# Altium PCB Parking_Guidance.PcbDoc
Units mm, origin at the board's own origin, x right, y up, seen from the top; angles counter-clockwise.
Board outline 152.4 x 101.6 mm, 2 copper layers (Top Layer, Bottom Layer); 101 components, 66 nets, 301 pads, 0 vias.
Unrouted connection lines stored in the file: 215.
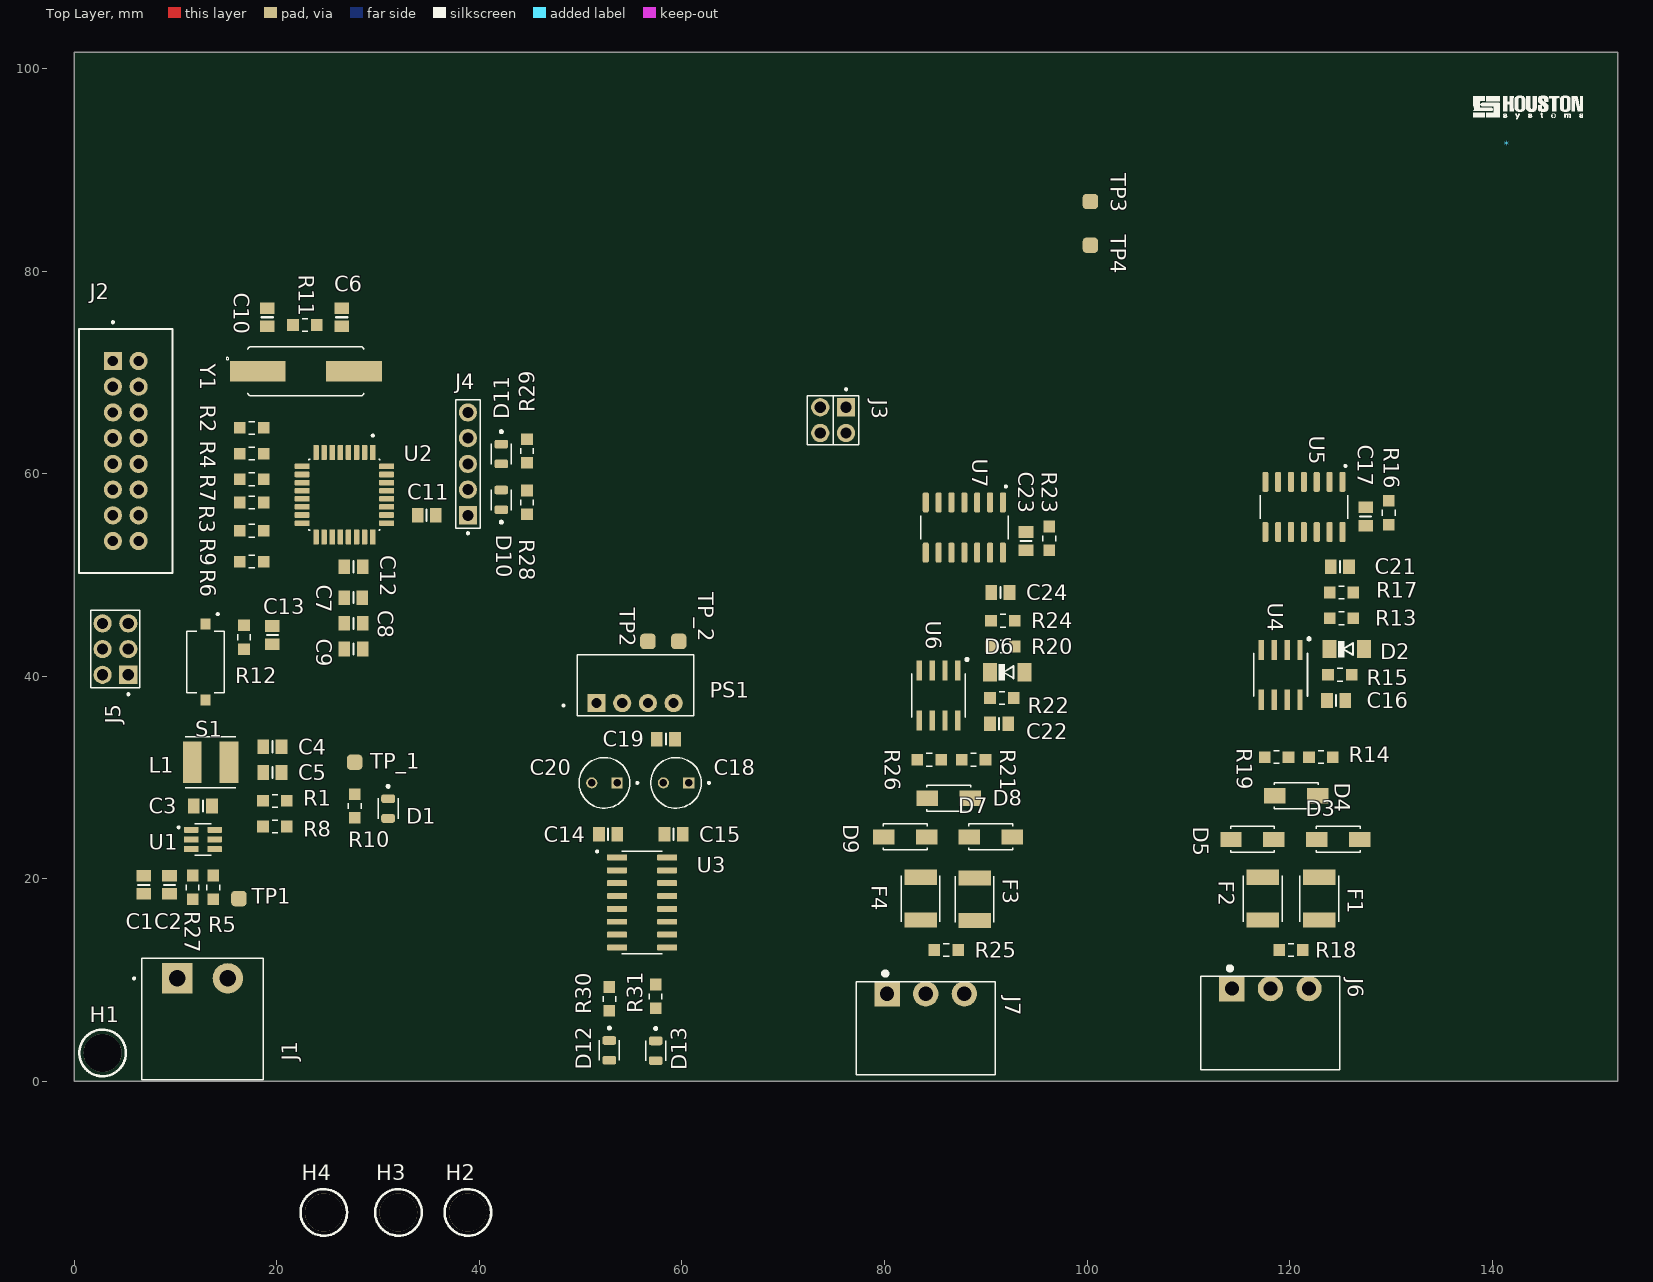
[diagram p0: Top Layer view]
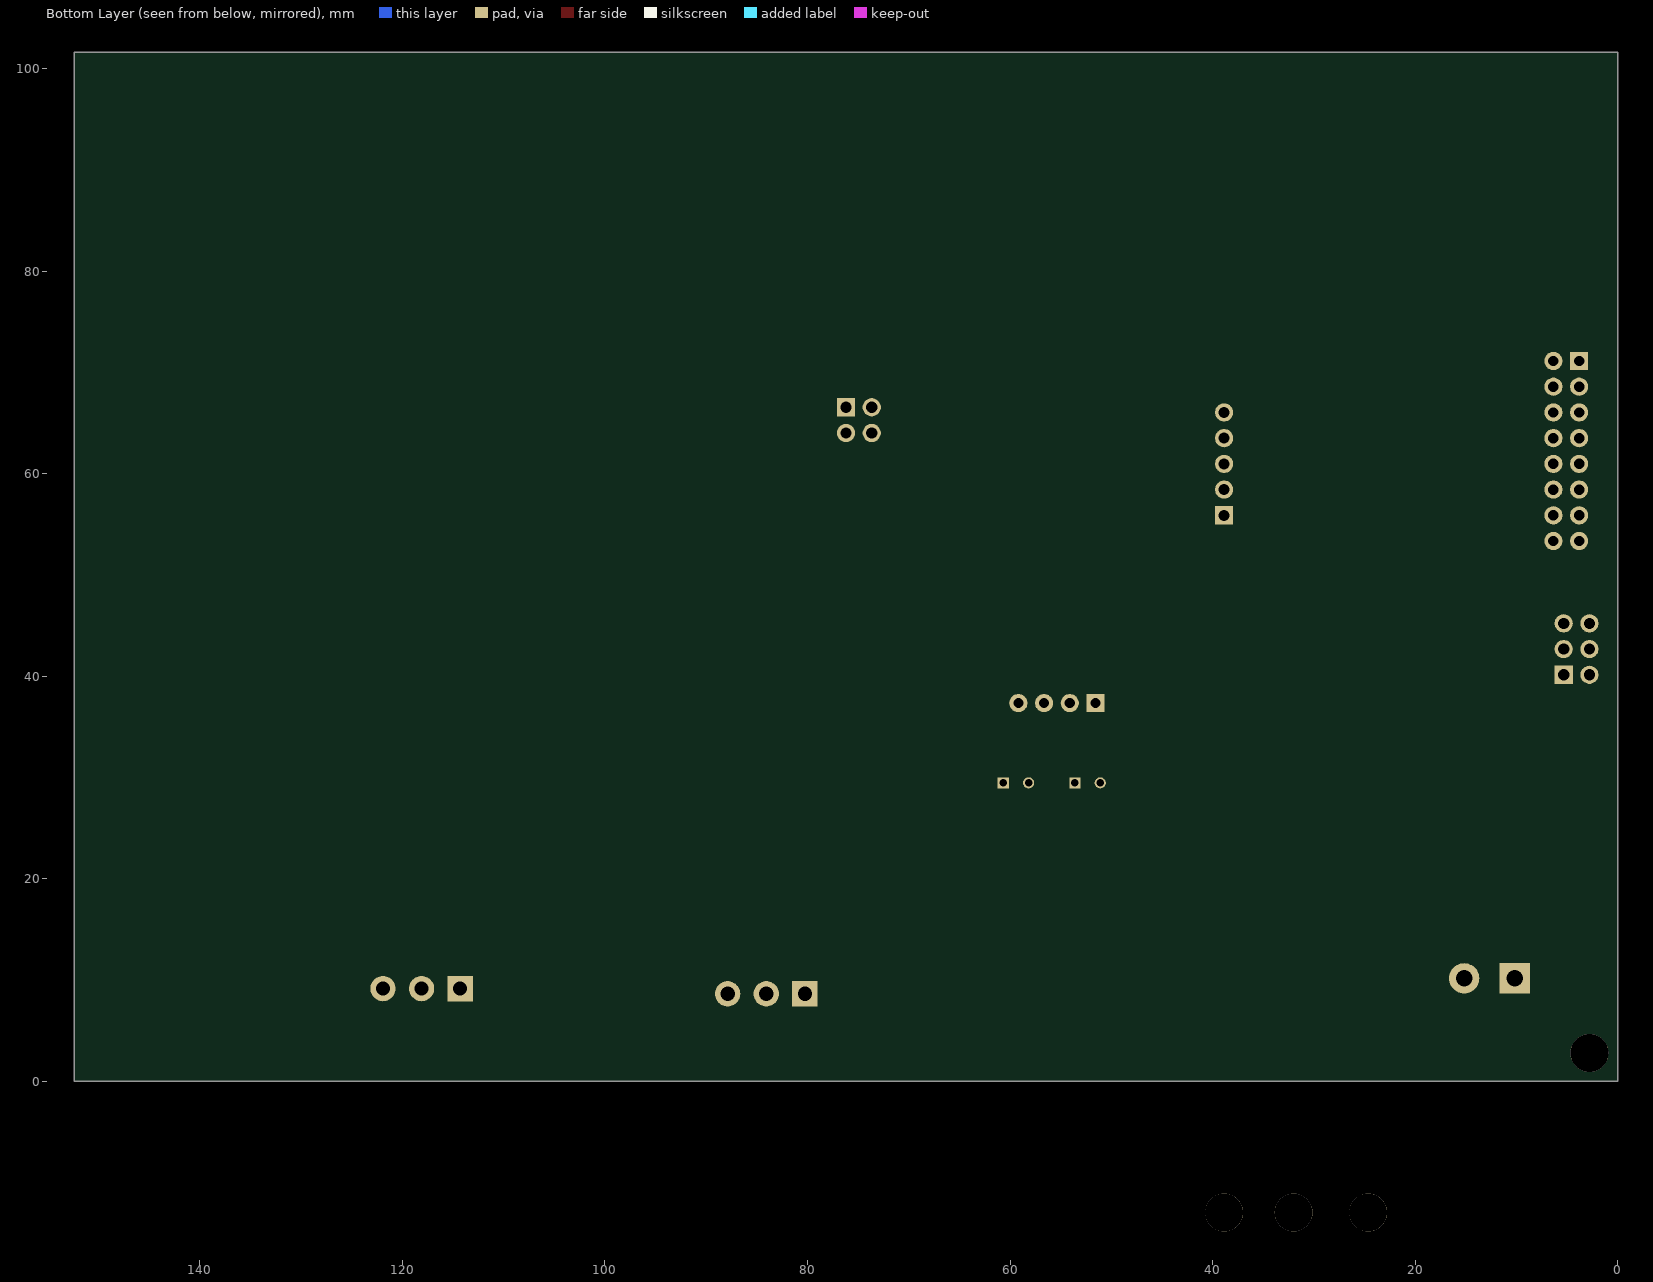
[diagram p1: Bottom Layer view, seen from below]

## Layer stack, top to bottom
Top Solder: solder mask 0.0102, Solder Resist, Dk 3.5
Top Layer: signal copper 0.0356
Dielectric 1: dielectric 0.32, FR-4, Dk 4.8
Bottom Layer: signal copper 0.0356
Bottom Solder: solder mask 0.0102, Solder Resist, Dk 3.5

## Board outline
0,0 152.4,0 152.4,101.6 0,101.6

## Design rules (kind name [scope] priority, off if disabled: settings)
Clearance [All] p1: gap=0.25 ignorepadtopadclearanceinfootprint=FALSE
PolygonConnect [All] p1: connectstyle=Relief reliefconductorwidth=0.254 reliefentries=4 polygonreliefangle="90 Angle" airgapwidth=0.254
RoutingVias [All] p1: holewidth=0.711 width=1.27 viastyle="Through Hole" minholewidth=0.711 minwidth=1.27 maxholewidth=0.711 maxwidth=1.27
SolderMaskExpansion [All] p1: expansion=0.102 istentingtop=FALSE
SupplyNets "Schematic Supply Nets_4" [InNet('GND')] p1: voltage=0.000
SupplyNets "Schematic Supply Nets_3" [InNet('+5')] p2: voltage=0.000
SupplyNets "Schematic Supply Nets_2" [InNet('+24')] p3: voltage=0.000
SupplyNets "Schematic Supply Nets_1" [InNet('EARTH')] p4: voltage=0.000
SupplyNets "Schematic Supply Nets" [InNet('VCC')] p5: voltage=0.000
Width [All] p1: maxlimit=0.254 minlimit=0.254 preferedwidth=0.254
30 further rules are at their usual default settings.

## Classes and differential pairs
component class PGS_4: * C14 C15 C16 C17 C18 C19 C20 C21 C22 C23 C24 D2 D3 D4 D5 D6 D7 D8 D9 D12 D13 F1 F2 F3 F4 H1 H2 H3 H4 J6 J7 PS1 R13 R14 R15 R16 R17 R18 R19 R20 R21 R22 R23 R24 R25 R26 R30 R31 U3 U4 U5 U6 U7
component class PGS_3: C1 C2 C3 C4 C5 C6 C7 C8 C9 C10 C11 C12 C13 D1 D10 D11 J1 J2 J3 J4 J5 L1 R1 R2 R3 R4 R5 R6 R7 R8 R9 R10 R11 R12 R27 R28 R29 S1 TP1 TP2 TP3 TP4 TP_1 TP_2 U1 U2 Y1

## Components (designator, comment, footprint, x,y, rotation, side; value= is the part's Value field where it differs from the comment)
* "HOUSTON_LOGO" HOUSTON_LOGO 141.478,92.456 r0 top
C1 "CAP 10uF 50V 0805" "CAP CER 0.1uF/50V 5%" 6.858,19.399 r90 top
C2 "CAP 0.1uF 50V 0805" "CAP CER 0.1uF/50V 5%" 9.398,19.399 r90 top
C3 "CAP 0.1uF 50V 0805" "CAP CER 0.1uF/50V 5%" 12.7,27.178 r180 top
C4 "CAP 22uF 50V 0805" "CAP CER 0.1uF/50V 5%" 19.558,33.02 r180 top
C5 "CAP 22uF 50V 0805" "CAP CER 0.1uF/50V 5%" 19.558,30.48 r180 top
C6 "CAP 22pF 50V 0805" "CAP CER 0.1uF/50V 5%" 26.416,75.438 r270 top
C7 "CAP 0.1uF 50V 0805" "CAP CER 0.1uF/50V 5%" 27.548,47.752 r180 top
C8 "CAP 0.1uF 50V 0805" "CAP CER 0.1uF/50V 5%" 27.57,45.212 r180 top
C9 "CAP 0.1uF 50V 0805" "CAP CER 0.1uF/50V 5%" 27.57,42.672 r180 top
C10 "CAP 22pF 50V 0805" "CAP CER 0.1uF/50V 5%" 19.05,75.438 r270 top
C11 "CAP 0.1uF 50V 0805" "CAP CER 0.1uF/50V 5%" 34.798,55.88 r0 top
C12 "CAP 0.1uF 50V 0805" "CAP CER 0.1uF/50V 5%" 27.57,50.8 r180 top
C13 "CAP 0.1uF 50V 0805" "CAP CER 0.1uF/50V 5%" 19.558,44.058 r270 top
C14 "CAP 0.1uF 50V 0805" "CAP CER 0.1uF/50V 5%" 52.716,24.384 r0 top
C15 "CAP 0.1uF 50V 0805" "CAP CER 0.1uF/50V 5%" 59.182,24.384 r0 top
C16 "CAP 0.1uF 50V 0805" "CAP CER 0.1uF/50V 5%" 124.598,37.592 r180 top
C17 "CAP 0.1uF 50V 0805" "CAP CER 0.1uF/50V 5%" 127.508,55.764 r270 top
C18 "CAP ELE 10µF 25V TH" "CAP ELE 10µF 25V TH" 59.416,29.464 r180 top
C19 "CAP 0.1uF 50V 0805" "CAP CER 0.1uF/50V 5%" 58.42,33.782 r0 top
C20 "CAP ELE 10µF 25V TH" "CAP ELE 10µF 25V TH" 52.344,29.464 r180 top
C21 "CAP 0.1uF 50V 0805" "CAP CER 0.1uF/50V 5%" 124.968,50.8 r180 top
C22 "CAP 0.1uF 50V 0805" "CAP CER 0.1uF/50V 5%" 91.324,35.306 r180 top
C23 "CAP 0.1uF 50V 0805" "CAP CER 0.1uF/50V 5%" 93.98,53.34 r270 top
C24 "CAP 0.1uF 50V 0805" "CAP CER 0.1uF/50V 5%" 91.44,48.26 r180 top
D1 "LED-0805" LED-0805 30.988,26.924 r270 top
D2 "DIODE FDLL4148 SOD80C" "DIODE SOD80C" 125.652,42.672 r0 top
D3 "TVS Diode DO-214AC" "TVS Diode DO-214AC" 124.797,23.876 r0 top
D4 "TVS Diode DO-214AC" "TVS Diode DO-214AC" 120.65,28.194 r0 top
D5 "TVS Diode DO-214AC" "TVS Diode DO-214AC" 116.332,23.876 r0 top
D6 "DIODE FDLL4148 SOD80C" "DIODE SOD80C" 92.124,40.386 r0 top
D7 "TVS Diode DO-214AC" "TVS Diode DO-214AC" 90.507,24.13 r0 top
D8 "TVS Diode DO-214AC" "TVS Diode DO-214AC" 86.36,27.94 r0 top
D9 "TVS Diode DO-214AC" "TVS Diode DO-214AC" 82.042,24.13 r0 top
D10 "LED-0805" LED-0805 42.164,57.404 r90 top
D11 "LED-0805" LED-0805 42.164,61.935 r270 top
D12 "LED-0805" LED-0805 52.832,3.048 r270 top
D13 "LED-0805" LED-0805 57.404,3.007 r270 top
F1 "FUSE JK010 1812" "FUSE JK010 1812" 122.936,18.034 r270 top
F2 "FUSE JK010 1812" "FUSE JK010 1812" 117.348,18.034 r270 top
F3 "FUSE JK010 1812" "FUSE JK010 1812" 88.9,17.966 r270 top
F4 "FUSE JK010 1812" "FUSE JK010 1812" 83.566,18.034 r270 top
H1 "ScrewHole_3.75mmD" "ScrewHole_3.75mmD - duplicate" 2.794,2.794 r0 top
H2 "ScrewHole_3.75mmD" "ScrewHole_3.75mmD - duplicate" 38.862,-12.954 r0 top
H3 "ScrewHole_3.75mmD" "ScrewHole_3.75mmD - duplicate" 32.004,-12.954 r0 top
H4 "ScrewHole_3.75mmD" "ScrewHole_3.75mmD - duplicate" 24.638,-12.954 r0 top
J1 "2 Pin Terminal Block 5MM RA" "2 Pin Terminal Block 5MM RA" 10.16,10.16 r0 top
J2 "BOX HEADER MALE THT S/T 8X2 2.54mm" "BOX HEADER MALE 8X2 2.54mm" 3.81,71.12 r270 top
J3 "4 Pin 2X2Pos BergeStick 2.54MM" "4 Pin BergeStick 2.54MM" 74.93,65.278 r270 top
J4 "5 Pin BergeStick 2.54MM" "5 Pin BergeStick 2.54MM" 38.862,60.96 r90 top
J5 "6 Pin BergeStick 2.54MM" "6 Pin BergeStick 2.54MM - duplicate" 4.064,42.672 r180 top
J6 "3 Pin Terminal Block 3.81MM RA" "3 Pin Terminal Block 3.81MM RA" 118.11,9.144 r0 top
J7 "3 Pin Terminal Block 3.81MM RA" "3 Pin Terminal Block 3.81MM RA" 84.074,8.636 r0 top
L1 "INDUCTOR 12uH SDE0403A-120M" "INDUCTOR 12uH SDE0403A-120M" 13.462,31.496 r0 top
PS1 "RFM-0505S SIP4" RFM-0505S 55.412,39.088 r0 top
R1 "RES 75K 0.25W 5% 0805" "RES 0805 10K/0.25W 5%" 19.812,27.686 r0 top
R2 "RES 0E 0.25W 5% 0805" "RES 0805 10K/0.25W 5%" 17.526,64.516 r0 top
R3 "RES 0E 0.25W 5% 0805" "RES 0805 10K/0.25W 5%" 17.526,57.15 r180 top
R4 "RES 0E 0.25W 5% 0805" "RES 0805 10K/0.25W 5%" 17.526,61.976 r0 top
R5 "RES 10K 0.25W 5% 0805" "RES 0805 10K/0.25W 5%" 13.716,19.145 r90 top
R6 "RES 0E 0.25W 5% 0805" "RES 0805 10K/0.25W 5%" 17.526,51.308 r0 top
R7 "RES 0E 0.25W 5% 0805" "RES 0805 10K/0.25W 5%" 17.526,59.436 r0 top
R8 "RES 10K 0.25W 5% 0805" "RES 0805 10K/0.25W 5%" 19.812,25.146 r180 top
R9 "RES 0E 0.25W 5% 0805" "RES 0805 10K/0.25W 5%" 17.526,54.356 r0 top
R10 "RES 470E 0.25W 5% 0805" "RES 0805 10K/0.25W 5%" 27.686,27.178 r90 top
R11 "RES 1M 0.25W 5% 0805" "RES 0805 10K/0.25W 5%" 22.765,74.676 r0 top
R12 "RES 10K 0.25W 5% 0805" "RES 0805 10K/0.25W 5%" 16.764,43.847 r90 top
R13 "RES 56K 0.25W 5% 0805" "RES 0805 10K/0.25W 5%" 125.127,45.72 r0 top
R14 "RES 4.7K 0.25W 5% 0805" "RES 0805 10K/0.25W 5%" 123.095,32.004 r0 top
R15 "RES 10K 0.25W 5% 0805" "RES 0805 10K/0.25W 5%" 124.968,40.132 r0 top
R16 "RES 4.7K 0.25W 5% 0805" "RES 0805 10K/0.25W 5%" 129.794,56.134 r270 top
R17 "RES 0E 0.25W 5% 0805" "RES 0805 10K/0.25W 5%" 125.127,48.26 r0 top
R18 "RES 120E 0.25W 5% 0805" "RES 0805 10K/0.25W 5%" 120.142,12.954 r0 top
R19 "RES 4.7K 0.25W 5% 0805" "RES 0805 10K/0.25W 5%" 118.713,32.004 r0 top
R20 "RES 56K 0.25W 5% 0805" "RES 0805 10K/0.25W 5%" 91.694,42.926 r0 top
R21 "RES 4.7K 0.25W 5% 0805" "RES 0805 10K/0.25W 5%" 88.805,31.75 r0 top
R22 "RES 10K 0.25W 5% 0805" "RES 0805 10K/0.25W 5%" 91.599,37.846 r0 top
R23 "RES 4.7K 0.25W 5% 0805" "RES 0805 10K/0.25W 5%" 96.266,53.594 r270 top
R24 "RES 0E 0.25W 5% 0805" "RES 0805 10K/0.25W 5%" 91.694,45.466 r0 top
R25 "RES 120E 0.25W 5% 0805" "RES 0805 10K/0.25W 5%" 86.106,12.954 r0 top
R26 "RES 4.7K 0.25W 5% 0805" "RES 0805 10K/0.25W 5%" 84.423,31.75 r0 top
R27 "RES 47K 0.25W 5% 0805" "RES 0805 10K/0.25W 5%" 11.684,19.145 r90 top
R28 "RES 470E 0.25W 5% 0805" "RES 0805 10K/0.25W 5%" 44.704,57.15 r90 top
R29 "RES 470E 0.25W 5% 0805" "RES 0805 10K/0.25W 5%" 44.704,62.23 r270 top
R30 "RES 470E 0.25W 5% 0805" "RES 0805 10K/0.25W 5%" 52.832,8.128 r90 top
R31 "RES 470E 0.25W 5% 0805" "RES 0805 10K/0.25W 5%" 57.404,8.382 r90 top
S1 "PUSHBUTTON_SMD_6.1 x 3.7 mm, 2.5 mm" "PUSHBUTTON_SMD_6.1 x 3.7 mm, 2.5 mm" 12.954,41.402 r270 top
TP1 "Touch Points 1mm" "Touch Points 1mm" 16.256,18.034 r0 top
TP2 "Touch Points 1mm" "Touch Points 1mm" 56.642,43.434 r0 top
TP3 "Touch Points 1mm" "Touch Points 1mm" 100.33,86.868 r270 top
TP4 "Touch Points 1mm" "Touch Points 1mm" 100.33,82.55 r270 top
TP_1 "Touch Points 1mm" "Touch Points 1mm" 27.686,31.496 r90 top
TP_2 "Touch Points 1mm" "Touch Points 1mm" 59.69,43.434 r0 top
U1 "Buck Reg_TPS54202DDCT" "Buck Reg_TPS54202DDCT" 12.7,23.876 r0 top
U2 "ATMEGA328P-AU 32-TQFP" "ATMEGA328P-AU 32-TQFP" 26.67,57.912 r270 top
U3 "MAX14850ASE SOIC16" MAX14850ASE 56.069,17.653 r0 top
U4 "MAX485CSA SOIC-8" MAX485CSA 119.126,40.132 r270 top
U5 "SN74HCT14D SOIC14" "SN74HCT14D SOIC14" 121.412,56.707 r270 top
U6 "MAX485CSA SOIC-8" MAX485CSA 85.344,38.1 r270 top
U7 "SN74HCT14D SOIC14" "SN74HCT14D SOIC14" 87.884,54.675 r270 top
Y1 "Crystal 16 Mhz SMD 2 pin" "Crystal 16 Mhz SMD 2 pin" 22.86,70.104 r0 top

## Footprints (in the part's own frame and the unit in brackets; to place one, negate y for a bottom-side part, rotate by r counter-clockwise, add the part's x,y. Pads: shape width x height; smd on the part's side, far side on the other; paste and mask are expansions set on the pad)
"2 Pin Terminal Block 5MM RA" [mm] "2 Pin Terminal Block HDR 5MM THT RA_OQ0271510000G"
  rect 3x3 hole 1.6: 1(0,0)
  round 3 hole 1.6: 2(5,0)
  silkscreen extent -4.35,-10 8.5,2, body extent -3.5,-10 8.5,2, height 8.5
"3 Pin Terminal Block 3.81MM RA" [mm] "3 Pin Terminal Block HDR 3.81MM THT RA 284513-3"
  rect 2.5x2.5 hole 1.4: 1(-3.81,0)
  round 2.5 hole 1.4: 2(0,0) 3(3.81,0)
  silkscreen extent -6.86,-8 6.86,2.2, body extent -6.86,-8 6.86,1.2, height 7.3
"4 Pin BergeStick 2.54MM" [mm] "4 Pin 2X2Pos THT S/T BergeStick 2.54MM Amphenol 67997-104HLF 3A AMPHENOL_67997-104HLF"
  rect 1.8x1.8 hole 1.1: 1(-1.27,1.27)
  round 1.8 hole 1.1: 2(1.27,1.27) 3(-1.27,-1.27) 4(1.27,-1.27)
  silkscreen extent -3.15,-2.54 2.41,2.54, body extent -2.41,-2.54 2.41,2.54, height 8.38
"5 Pin BergeStick 2.54MM" [mm] "5 Pin 5Pos THT S/T BergeStick 2.54MM Amphenol 68002-405HLF 3A AMPHENOL_68002-405HLF"
  rect 1.8x1.8 hole 1.092: 1(-5.08,0)
  round 1.8 hole 1.092: 2(-2.54,0) 3(0,0) 4(2.54,0) 5(5.08,0)
  silkscreen extent -6.95,-1.21 6.35,1.21, body extent -6.35,-1.2 6.35,1.2, height 8.38
"6 Pin BergeStick 2.54MM - duplicate" [mm] "6 Pin 3X3Pos THT S/T BergeStick 2.54MM Amphenol 69192-406HLF AMPHENOL_69192-406HLF"
  rect 1.8x1.8 hole 1.1: 1(-1.27,2.54)
  round 1.8 hole 1.1: 2(1.27,2.54) 3(-1.27,0) 4(1.27,0) 5(-1.27,-2.54) 6(1.27,-2.54)
  silkscreen extent -2.41,-3.81 2.41,4.56, body extent -2.41,-3.81 2.41,3.81, height 8.38
"ATMEGA328P-AU 32-TQFP" [mm] "AVR AVRÂ® ATmega Microcontroller IC 8-Bit 20MHz 32KB (16K x 16) FLASH 32-TQFP SMT (7x7)QFP80P900X900X120-32N"
  rrect25% 1.47x0.55 smd: 1(-4.17,2.8) 2(-4.17,2) 3(-4.17,1.2) 4(-4.17,0.4) 5(-4.17,-0.4) 6(-4.17,-1.2) 7(-4.17,-2) 8(-4.17,-2.8) 17(4.17,-2.8) 18(4.17,-2) 19(4.17,-1.2) 20(4.17,-0.4) 21(4.17,0.4) 22(4.17,1.2) 23(4.17,2) 24(4.17,2.8)
  rrect25% 0.55x1.47 smd: 9(-2.8,-4.17) 10(-2,-4.17) 11(-1.2,-4.17) 12(-0.4,-4.17) 13(0.4,-4.17) 14(1.2,-4.17) 15(2,-4.17) 16(2.8,-4.17) 25(2.8,4.17) 26(2,4.17) 27(1.2,4.17) 28(0.4,4.17) 29(-0.4,4.17) 30(-1.2,4.17) 31(-2,4.17) 32(-2.8,4.17)
  silkscreen extent -5.94,-3.5 3.5,3.5, body extent -4.5,-4.5 4.5,4.5, height 1.2
"BOX HEADER MALE 8X2 2.54mm" [mm] "THT S/T Straight BOX HEADER MALE 8X2 2.54mm 16 pin"
  rect 1.8x1.8 hole 1.02: 01(0,0)
  round 1.8 hole 1.02: 02(0,2.54) 03(2.54,0) 04(2.54,2.54) 05(5.08,0) 06(5.08,2.54) 07(7.62,0) 08(7.62,2.54) 09(10.16,0) 10(10.16,2.54) 11(12.7,0) 12(12.7,2.54) 13(15.24,0) 14(15.24,2.54) 15(17.78,0) 16(17.78,2.54)
  silkscreen extent -3.92,-3.36 20.95,5.9, body extent -4.95,-3.05 22.73,5.72, height 9.53
"Buck Reg_TPS54202DDCT" [mm] "4.5V to 28V Input, 2A Output, EMI Friendly Synchronous Step-Down SMT Converter TPS54202DDCT"
  rrect25% 1.45x0.59 smd: 1(-1.155,0.95) 2(-1.155,0) 3(-1.155,-0.95) 4(1.155,-0.95) 5(1.155,0) 6(1.155,0.95)
  silkscreen extent -2.5,-1.57 0.8,1.57, body extent -1.4,-1.45 1.4,1.45, height 1.1
"CAP CER 0.1uF/50V 5%" [mm] "CAP CER 0.1uF/50V  Ceramic Capacitor X7R 0805 (2012 Metric) SMT"
  rect 1.15x1.45 smd: 1(-0.9,0) 2(0.9,0)
  silkscreen extent 0,-0.55 0,0.55, body extent -1,-0.63 1,0.63, height 1.35
"CAP ELE 10µF 25V TH" [mm] "10µF 25V Aluminum Electrolytic Capacitors Radial Lead Type THT, Dia-5mm, Pitch-2mm ECEA1EN100UI"
  round 1.1 hole 0.75: N(1.25,0)
  rect 1.1x1.1 hole 0.75: P(-1.25,0)
  silkscreen extent -3.35,-2.5 2.5,2.5, body extent -2.5,-2.5 2.5,2.5, height 11
"Crystal 16 Mhz SMD 2 pin" [mm] "16 MHz Â±30ppm Crystal 20pF 60 Ohms HC-49/US FOXSDLF/128-20 16 Mhz Crystal SMD –CSM-4ALX(28ALX) SMT12.5mmX4.85mmX4mm"
  rect 5.5x2 smd: 1(-4.75,0) 2(4.75,0)
  silkscreen extent -7.88,-2.41 5.71,2.41, body extent -6.75,-2.5 6.75,2.5, height 4.5
"DIODE SOD80C" [mm] "Diode Standard 75V 200mA _DC_ SMT LLDS; MiniMelf DIODE SOD80C PMLL4148L"
  rect 1.4x1.8 smd: 1(-1.7,0) 2(1.7,0)
  silkscreen extent -0.86,-0.79 0.63,0.79, body extent -1.75,-0.76 1.75,0.8, height 0.8
"FUSE JK010 1812" [mm] "FUSE JK010 Polymeric PTC Resettable Fuse 60V 100 mA 0.8W Ih SMT 1812 (4532 Metric), Concave HUAAN MF-MSMF010-60V"
  rect 1.5x3.2 smd: 1(-2.1,0) 2(2.1,0)
  silkscreen extent -2.27,-1.91 2.27,1.91, body extent -2.27,-1.62 2.27,1.62, height 0.85
HOUSTON_LOGO [mm]
  silkscreen extent -3.35,2.52 7.49,4.87
"INDUCTOR 12uH SDE0403A-120M" [mm] "INDUCTOR_2020(5.5mmX4.5mm)  SMT INDUCTOR 12uH SDE0403A-120M LQH5BPB4R7NT0L"
  rect 1.85x4.1 smd: 1(-1.825,0) 2(1.825,0)
  silkscreen extent -2.5,-2.5 2.5,2.5, body extent -2.45,-2.45 2.45,2.45, height 4
LED-0805 [mm] "Red 640nm LED Indication - Discrete 1.85V 0805 (2012 Metric) SMT APT2012SRCPRV"
  rrect50% 0.86x1.36 smd: A(0.975,0) C(-0.975,0)
  silkscreen extent -2.3,-0.99 1,0.99, body extent -1,-0.63 1,0.63, height 0.75
MAX485CSA [mil] "MAX485CSA-RS-485/RS-422 Transceivers, SOIC-8 SMT"
  rect 78x21 smd: 1(-97,75) 2(-97,25) 3(-97,-25) 4(-97,-75) 5(97,-75) 6(97,-25) 7(97,25) 8(97,75)
  silkscreen extent -145,-104 84,115, body extent -118,-96 118,96, height 69
MAX14850ASE [mm] "MAX14850ASE SOIC16 Six-Channel SMT Digital Isolator SOIC127P600X175-16N"
  rrect25% 1.97x0.59 smd: 1(-2.475,4.445) 2(-2.475,3.175) 3(-2.475,1.905) 4(-2.475,0.635) 5(-2.475,-0.635) 6(-2.475,-1.905) 7(-2.475,-3.175) 8(-2.475,-4.445) 9(2.475,-4.445) 10(2.475,-3.175) 11(2.475,-1.905) 12(2.475,-0.635) 13(2.475,0.635) 14(2.475,1.905) 15(2.475,3.175) 16(2.475,4.445)
  silkscreen extent -4.54,-5.06 2,5.13, body extent -3,-4.95 3,4.95, height 1.75
"PUSHBUTTON_SMD_6.1 x 3.7 mm, 2.5 mm" [mm] "6.1 x 3.7 mm, 2.5 mm Actuator Height, 260 gf, Red, SMT, SPST, Tactile Switch, TS09-63-25-R-260-SMT-TR"
  rect 1.1x1 smd: 1(-3.75,0) 2(3.75,0)
  silkscreen extent -4.82,-1.85 3.05,1.85, body extent -4.05,-1.85 4.05,1.85, height 2.5
"RES 0805 10K/0.25W 5%" [mm] "RESISTOR, THICK FILM, 10K, 5%, 0805, SMT FULL REEL Product Range:PANASONIC - ERJ Series"
  rect 1.15x1.15 smd: 1(-1.175,0) 2(1.175,0)
  silkscreen extent -0.28,-0.63 0.28,0.63, body extent -1,-0.63 1,0.63, height 0.7
RFM-0505S [mm] "DC-DC Converter/Isolator, SIP4, THT S/T 1kV unreg, Single Output, 1W, 5V Out, RFM Series RFM-0505S"
  rect 1.8x1.8 hole 1: 1(-3.85,-1.75)
  round 1.8 hole 1: 2(-1.31,-1.75) 3(1.23,-1.75) 4(3.77,-1.75)
  silkscreen extent -7.21,-3 5.75,3, body extent -5.75,-3 5.75,3, height 9.5
"ScrewHole_3.75mmD - duplicate" [mm] "SCREW HEAD DIA 4.5MM, SREW LEG DIA 3 MM"
  round 3.75 hole 3.75 unplated: 1(0,0)
  silkscreen extent -2.3,-2.3 2.3,2.3
"SN74HCT14D SOIC14" [mm] "SN74HCT14D SOIC14 6-ch, 4.5V to 5.5V SMT inverters with Schmitt-Trigger inputs"
  rrect50% 1.97x0.6 smd: 1(-2.475,3.81) 2(-2.475,2.54) 3(-2.475,1.27) 4(-2.475,0) 5(-2.475,-1.27) 6(-2.475,-2.54) 7(-2.475,-3.81) 8(2.475,-3.81) 9(2.475,-2.54) 10(2.475,-1.27) 11(2.475,0) 12(2.475,1.27) 13(2.475,2.54) 14(2.475,3.81)
  silkscreen extent -4.15,-4.33 1.17,4.33, body extent -3,-4.33 3,4.33, height 1.75
"Touch Points 1mm" [mil] "Touch Points 0.75mm to1mm"
  rrect50% 60x60 smd: 1(0,0)
"TVS Diode DO-214AC" [mm] "TVS Diode BiDirectional LittileFuse SMT 1.5SMC6.8CA DO-214AC 6V8C"
  rect 2.12x1.5 smd: 1(-2.115,0) 2(2.115,0)
  silkscreen extent -2.16,-1.28 2.16,1.28, body extent -2.61,-1.27 2.61,1.33, height 2.4

## Part data
C1 C2 C3 C4 C5 C6 C7 C8 C9 C10 C11 C12 C13 C14 C15 C16 C17 C19 C21 C22 C23 C24: library part "CAP CER 0.1uF/50V 5%", "CAP CER 0.1uF/50V  Ceramic Capacitor X7R 0805 (2012 Metric)", Package="0805 Samsung", Check_prices=https://www.snapeda.com/parts/CL21B104KCFNNNE/Samsung+Electro-Mechanics/view-part/?ref=eda, Digi-Key_Part_Number=1276-6840-2-ND, MF=Samsung, MP=CL21B104KCFNNNE, Purchase-URL=https://pricing.snapeda.com/search?q=CL21B104KCFNNNE&ref=eda, SnapEDA_Link=https://www.snapeda.com/parts/CL21B104KCFNNNE/Samsung+Electro-Mechanics/view-part/?ref=snap
C18 C20: "10µF 25V Aluminum Electrolytic Capacitors Radial Lead Type TH, Dia-5mm, Pitch-2mm ECEA1EN100UI", Package="RADIAL-2 Panasonic", Check_prices=https://www.snapeda.com/parts/ECEA1EN100UI/Panasonic/view-part/5788532/?ref=eda, Digi-Key_Part_Number=ECE-A1EN100UI-ND, MF=Panasonic, MP=ECEA1EN100UI, Purchase-URL=https://pricing.snapeda.com/search/part/ECEA1EN100UI/?ref=eda, SnapEDA_Link=https://www.snapeda.com/parts/ECEA1EN100UI/Panasonic/view-part/5788532/?ref=snap
D1: "Red 640nm LED Indication - Discrete 1.85V 0805 (2012 Metric) APT2012SRCPRV", Package="0805 Kingbright", Check_prices=https://www.snapeda.com/parts/APT2012SRCPRV/Kingbright/view-part/?ref=eda, MF=Kingbright, MP=APT2012SRCPRV, SnapEDA_Link=https://www.snapeda.com/parts/APT2012SRCPRV/Kingbright/view-part/?ref=snap
D2 D6: "FDLL4148 Diode Standard 75V 200mA _DC_ Surface Mount LLDS; MiniMelf DIODE SOD80C PMLL4148L", Package="SOD-80 NXP Semiconductors", Availability=Unavailable, MF="Nexperia USA", MP=PMLL4148L, Price=None, SnapEDA_Link=https://www.snapeda.com/parts/PMLL4148L/Nexperia%20USA%20Inc./view-part/9225/?ref=snap
D3 D4 D5 D7 D8 D9: "TVS Diode BiDirectional LittileFuse 1.5SMC6.8CA DO-214AC 6V8C", Package=None, Availability=Unavailable, MP=SMAJ7.5CA, Price=None
D10 D11 D12 D13: "Red 640nm LED Indication - Discrete 1.85V 0805 (2012 Metric) SMT APT2012SRCPRV", Package="0805 Kingbright", Check_prices=https://www.snapeda.com/parts/APT2012SRCPRV/Kingbright/view-part/?ref=eda, MF=Kingbright, MP=APT2012SRCPRV, SnapEDA_Link=https://www.snapeda.com/parts/APT2012SRCPRV/Kingbright/view-part/?ref=snap
F1 F2 F3 F4: "FUSE JK010 Polymeric PTC Resettable Fuse 60V 100 mA 0.8W Ih Surface Mount 1812 (4532 Metric), Concave HUAAN MF-MSMF010-60V", Package="1812 Bourns", Availability="In Stock", Check_prices=https://www.snapeda.com/parts/MF-MSMF010-2/Bourns/view-part/?ref=eda, MF=Bourns, MP=MF-MSMF010-2, Price=None, Purchase-URL=https://pricing.snapeda.com/search/part/MF-MSMF010-2/?ref=eda, SnapEDA_Link=https://www.snapeda.com/parts/MF-MSMF010-2/Bourns/view-part/?ref=snap
H1 H2 H3 H4: "SCREW HEAD DIA 4.5MM, SREW LEG DIA 3 MM"
J1: "2 Pin Terminal Block HDR 5MM THT RA _OQ0271510000G", Package=None, Check_prices=https://www.snapeda.com/parts/OQ0271510000G/Amphenol/view-part/?ref=eda, MF="Amphenol Anytek", MP=OQ0271510000G, SnapEDA_Link=https://www.snapeda.com/parts/OQ0271510000G/Amphenol/view-part/?ref=snap
J2: "THT BOX HEADER MALE S/T 8X2 2.54mm 16 pin", Package=None, Availability=Unavailable, MP=TSS-108-01-T-D, Price=None
J3: "4 Pin 2X2Pos THT S/T BergeStick 2.54MM Amphenol 67997-104HLF 3A", Package=None, Check_prices=https://www.snapeda.com/parts/67997-104HLF/Amphenol+FCI/view-part/?ref=eda, Digi-Key_Part_Number=609-3225-ND, MF="Amphenol ICC", MP=67997-104HLF, Purchase-URL=https://pricing.snapeda.com/search/part/67997-104HLF/?ref=eda, SnapEDA_Link=https://www.snapeda.com/parts/67997-104HLF/Amphenol+FCI/view-part/?ref=snap
J4: "5 Pin 5Pos THT S/T BergeStick 2.54MM Amphenol68002-405HLF 3A", Package=None, Availability=Unavailable, MP=68002-405HLF, Price=None
J5: library part "6 Pin BergeStick 2.54MM_1", "6 Pin 3X3Pos THT S/T BergeStick 2.54MM Amphenol 69192-406HLF", Package=None, Check_prices=https://www.snapeda.com/parts/69192-406HLF/Amphenol/view-part/?ref=eda, Digi-Key_Part_Number=609-4711-ND, MF="AMPHENOL ICC / FCI", MP=69192-406HLF, Purchase-URL=https://pricing.snapeda.com/search/part/69192-406HLF/?ref=eda, SnapEDA_Link=https://www.snapeda.com/parts/69192-406HLF/Amphenol/view-part/?ref=snap
J6 J7: "3 Pin Terminal Block HDR 3.81MM THT RA 284513-3", Package=None, Availability="In Stock", Check_prices=https://www.snapeda.com/parts/284513-3/TE+Connectivity+AMP+Connectors/view-part/?ref=eda, EU_RoHS_Compliance=Compliant, MF="TE Connectivity", MP=284513-3, Price=None, Purchase-URL=https://pricing.snapeda.com/search/part/284513-3/?ref=eda, SnapEDA_Link=https://www.snapeda.com/parts/284513-3/TE+Connectivity+AMP+Connectors/view-part/?ref=snap
L1: "INDUCTOR_2020(5.5mmX4.5mm)  SMT INDUCTOR 12uH SDE0403A-120M0 LQH5BPB4R7NT0L", Package=None, Availability=Unavailable, MP=LQH5BPB4R7NT0L, Price=None
PS1: library part RFM-0505S, "DC-DC Converter/Isolator, SIP4, 1kV unreg, Single Output, 1W, 5V Out, RFM Series", Package="SIP-4 Recom Power", Check_prices=https://www.snapeda.com/parts/RFM-0505S/Recom+Power/view-part/?ref=eda, MF="Recom Power", MP=RFM-0505S, SnapEDA_Link=https://www.snapeda.com/parts/RFM-0505S/Recom+Power/view-part/?ref=snap
R1 R2 R3 R4 R6 R7 R9 R10 R11 R13 R14 R16 R17 R18 R19 R20 R21 R23 R24 R25 R26 R27: library part "RES 10K 0.25W 5% 0805", "RESISTOR, THICK FILM, 10K, 5%, 0805 0.25W", Package="805-2 Panasonic", Availability="In Stock", Check_prices=https://www.snapeda.com/parts/ERJ-6GEYJ103V/Panasonic+Electronic+Components/view-part/?ref=eda, MF="Panasonic Electronic", MP=ERJ-6GEYJ103V, Price=None, Purchase-URL=https://pricing.snapeda.com/search/part/ERJ-6GEYJ103V/?ref=eda, SnapEDA_Link=https://www.snapeda.com/parts/ERJ-6GEYJ103V/Panasonic+Electronic+Components/view-part/?ref=snap
R5 R8 R12 R15 R22: "RESISTOR, THICK FILM, 10K, 5%, 0805 0.25W", Package="805-2 Panasonic", Availability="In Stock", Check_prices=https://www.snapeda.com/parts/ERJ-6GEYJ103V/Panasonic+Electronic+Components/view-part/?ref=eda, MF="Panasonic Electronic", MP=ERJ-6GEYJ103V, Price=None, Purchase-URL=https://pricing.snapeda.com/search/part/ERJ-6GEYJ103V/?ref=eda, SnapEDA_Link=https://www.snapeda.com/parts/ERJ-6GEYJ103V/Panasonic+Electronic+Components/view-part/?ref=snap
R28 R29 R30 R31: library part "RES 10K 0.25W 5% 0805", "RESISTOR, THICK FILM, 10K, 5%, 0805 0.25W SMT", Package="805-2 Panasonic", Availability="In Stock", Check_prices=https://www.snapeda.com/parts/ERJ-6GEYJ103V/Panasonic+Electronic+Components/view-part/?ref=eda, MF="Panasonic Electronic", MP=ERJ-6GEYJ103V, Price=None, Purchase-URL=https://pricing.snapeda.com/search/part/ERJ-6GEYJ103V/?ref=eda, SnapEDA_Link=https://www.snapeda.com/parts/ERJ-6GEYJ103V/Panasonic+Electronic+Components/view-part/?ref=snap
S1: "6.1 x 3.7 mm, 2.5 mm Actuator Height, 260 gf, Red, Surface Mount, SPST, Tactile Switch, TS09-63-25-R-260-SMT-TR", Package=None, Check_prices=https://www.snapeda.com/parts/TS09-63-25-R-260-SMT-TR/Same+Sky/view-part/?ref=eda, MF="Same Sky", MP=TS09-63-25-R-260-SMT-TR, SnapEDA_Link=https://www.snapeda.com/parts/TS09-63-25-R-260-SMT-TR/Same+Sky/view-part/?ref=snap
TP1 TP2 TP3 TP4 TP_1 TP_2: library part "Touch Points", "Touch Points 0.75mm to1mm"
U1: library part TPS54202DDCT, "4.5V to 28V Input, 2A Output, EMI Friendly Synchronous Step-Down Converter TPS54202DDCT", Package="SOT-23-THN-6 Texas Instruments", Check_prices=https://www.snapeda.com/parts/TPS54202DDCT/Texas+Instruments/view-part/?ref=eda, MF="Texas Instruments", MP=TPS54202DDCT, SnapEDA_Link=https://www.snapeda.com/parts/TPS54202DDCT/Texas+Instruments/view-part/?ref=snap
U2: library part ATMEGA328P-AU_1, "AVR AVRÂ® ATmega Microcontroller IC 8-Bit 20MHz 32KB (16K x 16) FLASH 32-TQFP (7x7)", Package="TQFP-32 Microchip", Check_prices=https://www.snapeda.com/parts/ATMEGA328P-AU/Microchip/view-part/?ref=eda, MF=Microchip, MP=ATMEGA328P-AU, SnapEDA_Link=https://www.snapeda.com/parts/ATMEGA328P-AU/Microchip/view-part/?ref=snap
U3: library part MAX14850ASE+T, "MAX14850ASE SOIC16 Six-Channel Digital Isolator", Package="SOIC-16 Maxim Integrated", Check_prices=https://www.snapeda.com/parts/MAX14850ASE+T/Analog+Devices/view-part/?ref=eda, MF="Analog Devices", MP=MAX14850ASE+T, SnapEDA_Link=https://www.snapeda.com/parts/MAX14850ASE+T/Analog+Devices/view-part/?ref=snap
U4 U6: library part MAX485CSA, "MAX485CSA-RS-485/RS-422 Transceivers, SOIC-8", Package="SOIC-8 Maxim", Check_prices=https://www.snapeda.com/parts/MAX485CSA+/Analog+Devices/view-part/?ref=eda, MF="Analog Devices", MP=MAX485CSA+, SnapEDA_Link=https://www.snapeda.com/parts/MAX485CSA+/Analog+Devices/view-part/?ref=snap
U5 U7: library part SN74HCT14D, "SN74HCT14D SOIC14 6-ch, 4.5-V to 5.5-V inverters with Schmitt-Trigger inputs", Package="SOIC-14 Texas Instruments", Check_prices=https://www.snapeda.com/parts/SN74HCT14D/Texas+Instruments/view-part/?ref=eda, MF="Texas Instruments", MP=SN74HCT14D, SnapEDA_Link=https://www.snapeda.com/parts/SN74HCT14D/Texas+Instruments/view-part/?ref=snap
Y1: library part "Crystal 16 Mhz SMD 2 pin_1", "16 MHz Â±30ppm Crystal 20pF 60 Ohms HC-49/US FOXSDLF/128-20 16 Mhz Crystal SMD –CSM-4ALX(28ALX) 12.5mmX4.85mmX4mm", Package="HC49SD Fox Electronics", Check_prices=https://www.snapeda.com/parts/FOXSDLF/128-20/Fox+Electronics/view-part/?ref=eda, MF="Fox Electronics", MP=FOXSDLF/128-20, SnapEDA_Link=https://www.snapeda.com/parts/FOXSDLF/128-20/Fox+Electronics/view-part/?ref=snap

## Nets (pads, with @x,y where several pads share a name; then routed paths per layer and width w, separated by ;. In a path a pad name is that pad's centre, name@x,y a point inside that pad or via, vN(x,y) a via of type N, cw(c..) or ccw(c..) an arc to the next point about the centre after c; other vN are vias at no path point)
+5: C4.2 C5.2 C7.2 C8.2 C9.2 C13.2 C14.2 C20.P J4.4 J5.4 L1.2 PS1.2 R1.2 R10.2 R12.1 TP_1.1 U2.4 U2.6 U2.18 U3.1
+24: C1.2 C2.2 J1.1 R27.2 U1.3
A1: F2.2 J6.2 R18.1
A2: F4.2 J7.2 R25.1
A_D6/PD6: R2.2 U2.10
B1: F1.2 J6.3 R18.2
B2: F3.2 J7.3 R25.2
B_D7/PD7: R4.2 U2.11
CLK_D13/PB5: J5.2 R6.2 U2.17
DATA_D11/PB3: J5.5 R9.2 U2.15
DTR: C11.2 J4.1
EARTH: C15.1 C16.1 C17.1 C18.N C19.1 C21.1 C22.1 C23.1 C24.1 D3.2 D5.1 D7.2 D9.1 J6.1 J7.1 PS1.3 R14.2 R21.2 R30.2 R31.2 TP2.1 U3.9 U4.5 U5.7 U6.5 U7.7
EN1: U4.2 U4.3 U5.12
EN2: U6.2 U6.3 U7.12
EN_D9/PB1: R3.1 U2.13
END1: C21.2 R17.1 U3.11 U5.13
END2: C24.2 R24.1 U3.10 U7.13
ENM1/D2: U2.32 U3.6
ENM2/D3: U2.9 U3.7
GND: C1.1 C2.1 C4.1 C5.1 C6.1 C7.1 C8.1 C9.1 C10.1 C12.1 C13.1 C14.1 C20.N D1.C J1.2 J2.03 J2.05 J2.07 J2.09 J2.11 J2.13 J2.15 J4.5 J5.6 PS1.1 R5.1 R8.1 R28.2 R29.2 S1.2 TP1.1 U1.1 U2.3 U2.5 U2.21 U3.8
MISO: J5.1 U2.16
NetC3_1: C3.1 U1.6
NetC3_2: C3.2 L1.1 U1.2
NetC12_2: C12.2 U2.20
NetD1_A: D1.A R10.1
NetD2_1: D2.1 R13.1 U4.4 U5.10
NetD2_2: D2.2 R13.2 R17.2
NetD3_1: D3.1 D4.2 F1.1 R14.1 U4.7
NetD4_1: D4.1 D5.2 F2.1 R19.2 U4.6
NetD6_1: D6.1 R20.1 U6.4 U7.10
NetD6_2: D6.2 R20.2 R24.2
NetD7_1: D7.1 D8.2 F3.1 R21.1 U6.7
NetD8_1: D8.1 D9.2 F4.1 R26.2 U6.6
NetD10_C: D10.C R28.1
NetD11_C: D11.C R29.1
NetD12_A: D12.A U7.2 U7.11
NetD12_C: D12.C R30.1
NetD13_A: D13.A U7.3 U7.8
NetD13_C: D13.C R31.1
NetJ2_01: J2.01 R3.2
NetJ2_02: J2.02 R2.1
NetJ2_04: J2.04 R4.1
NetJ2_08: J2.08 R6.1
NetJ2_10: J2.10 R7.1
NetJ2_12: J2.12 R9.1
NetR1_1: R1.1 R8.2 U1.4
NetR5_2: R5.2 R27.1 U1.5
NetU5_2: U5.2 U5.11
NetU5_3: U5.3 U5.8
R\S\T\\: C11.1 J5.3 R12.2 S1.1 U2.29
RO1: R15.1 U4.1 U5.9
RO2: R22.1 U6.1 U7.9
RX485: J3.2 U3.4
RXD1: U3.13 U5.4
RXD2: U3.12 U7.4
RXM1: D10.A J3.1 J4.2 U2.30
RXM2: TP3.1 U2.2 U3.5
SCLK_D8/PB0: R7.2 U2.12
TX485: J3.4 U3.2
TXD1: R16.1 U3.15 U5.1
TXD2: R23.1 U3.14 U7.1
TXM1: D11.A J3.3 J4.3 U2.31
TXM2: TP4.1 U2.1 U3.3
VCC: C15.2 C16.2 C17.2 C18.P C19.2 C22.2 C23.2 PS1.4 R15.2 R16.2 R19.1 R22.2 R23.2 R26.1 TP_2.1 U3.16 U4.8 U5.14 U6.8 U7.14
XTAL1: C6.2 R11.2 U2.7 Y1.2
XTAL2: C10.2 R11.1 U2.8 Y1.1
pads on no net: H1.1 H2.1 H3.1 H4.1 J2.06 J2.14 J2.16 U2.14 U2.19 U2.22 U2.23 U2.24 U2.25 U2.26 U2.27 U2.28 U5.5 U5.6 U7.5 U7.6